# Altium PCB DC-DC PCB.PcbDoc
Units mm, origin at the board's own origin, x right, y up, seen from the top; angles counter-clockwise.
Board outline 99 x 99 mm, 2 copper layers (Top Layer, Bottom Layer); 57 components, 30 nets, 133 pads, 36 vias.
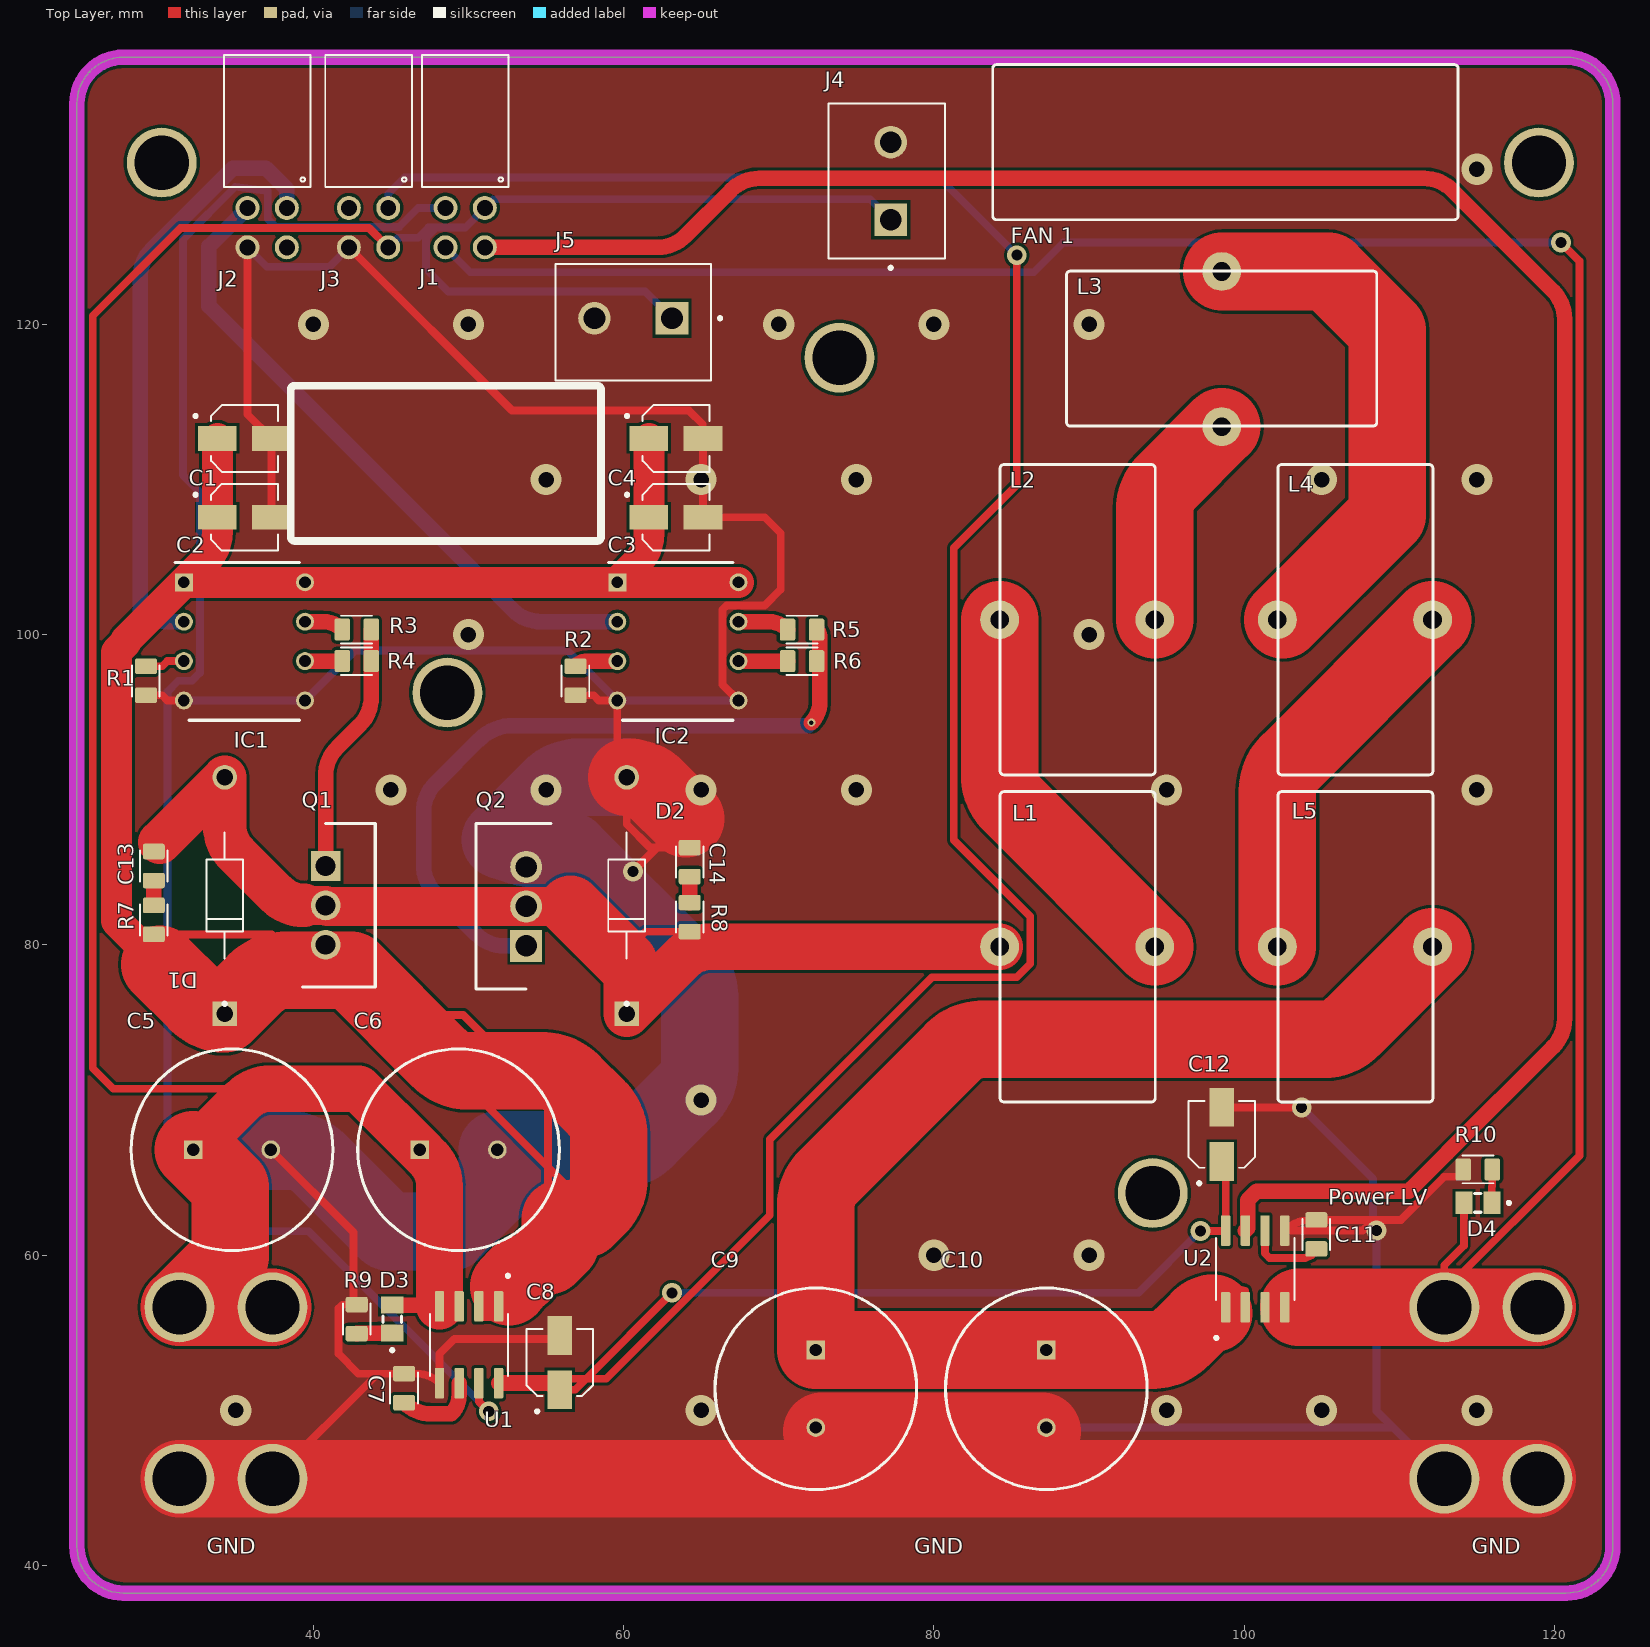
[diagram p0: Top Layer view]
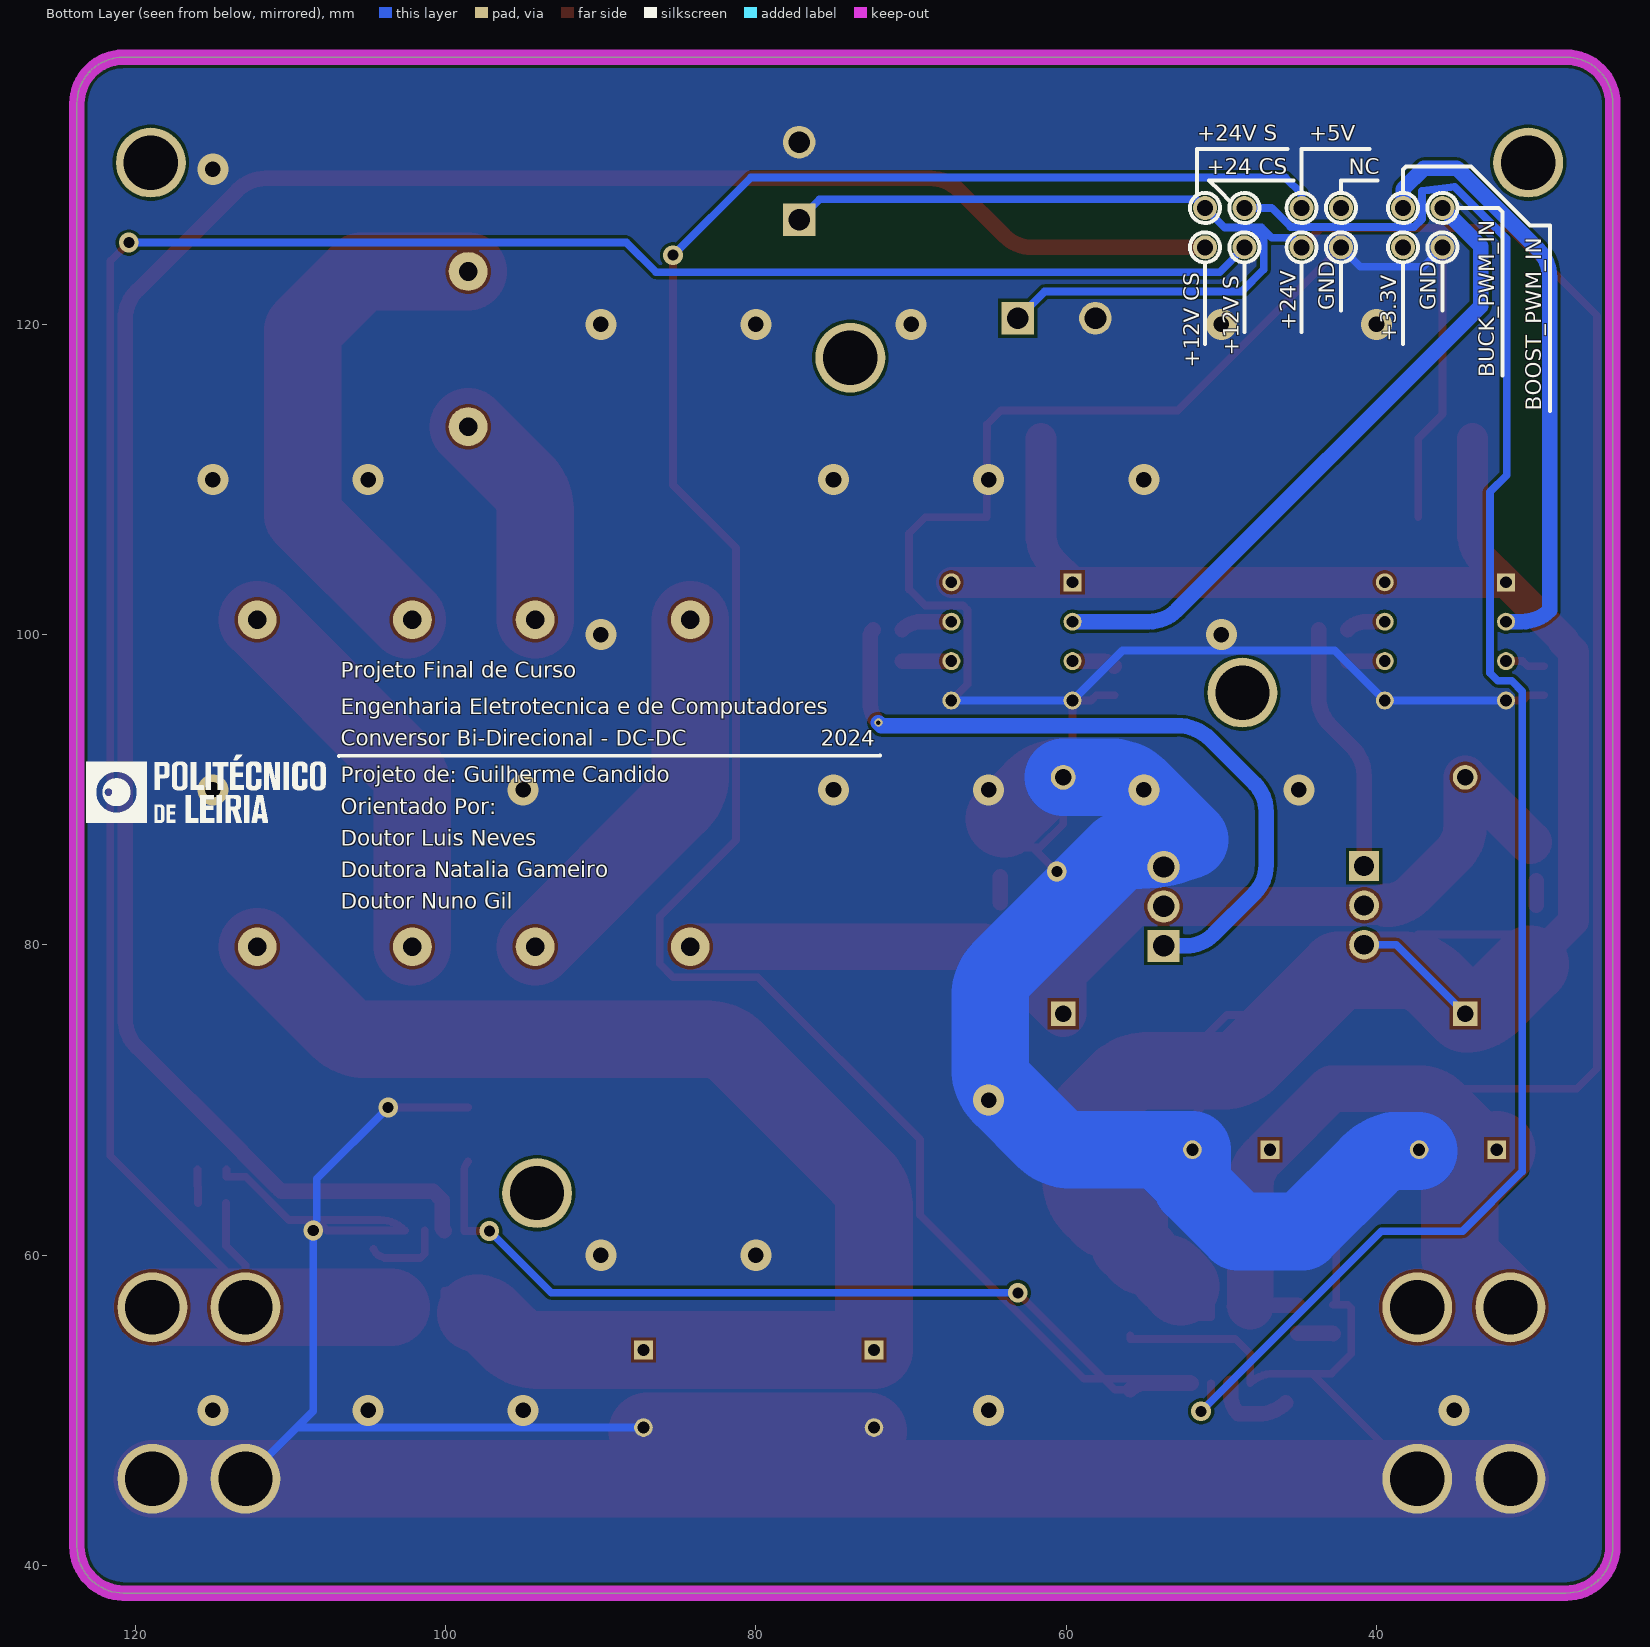
[diagram p1: Bottom Layer view, seen from below]
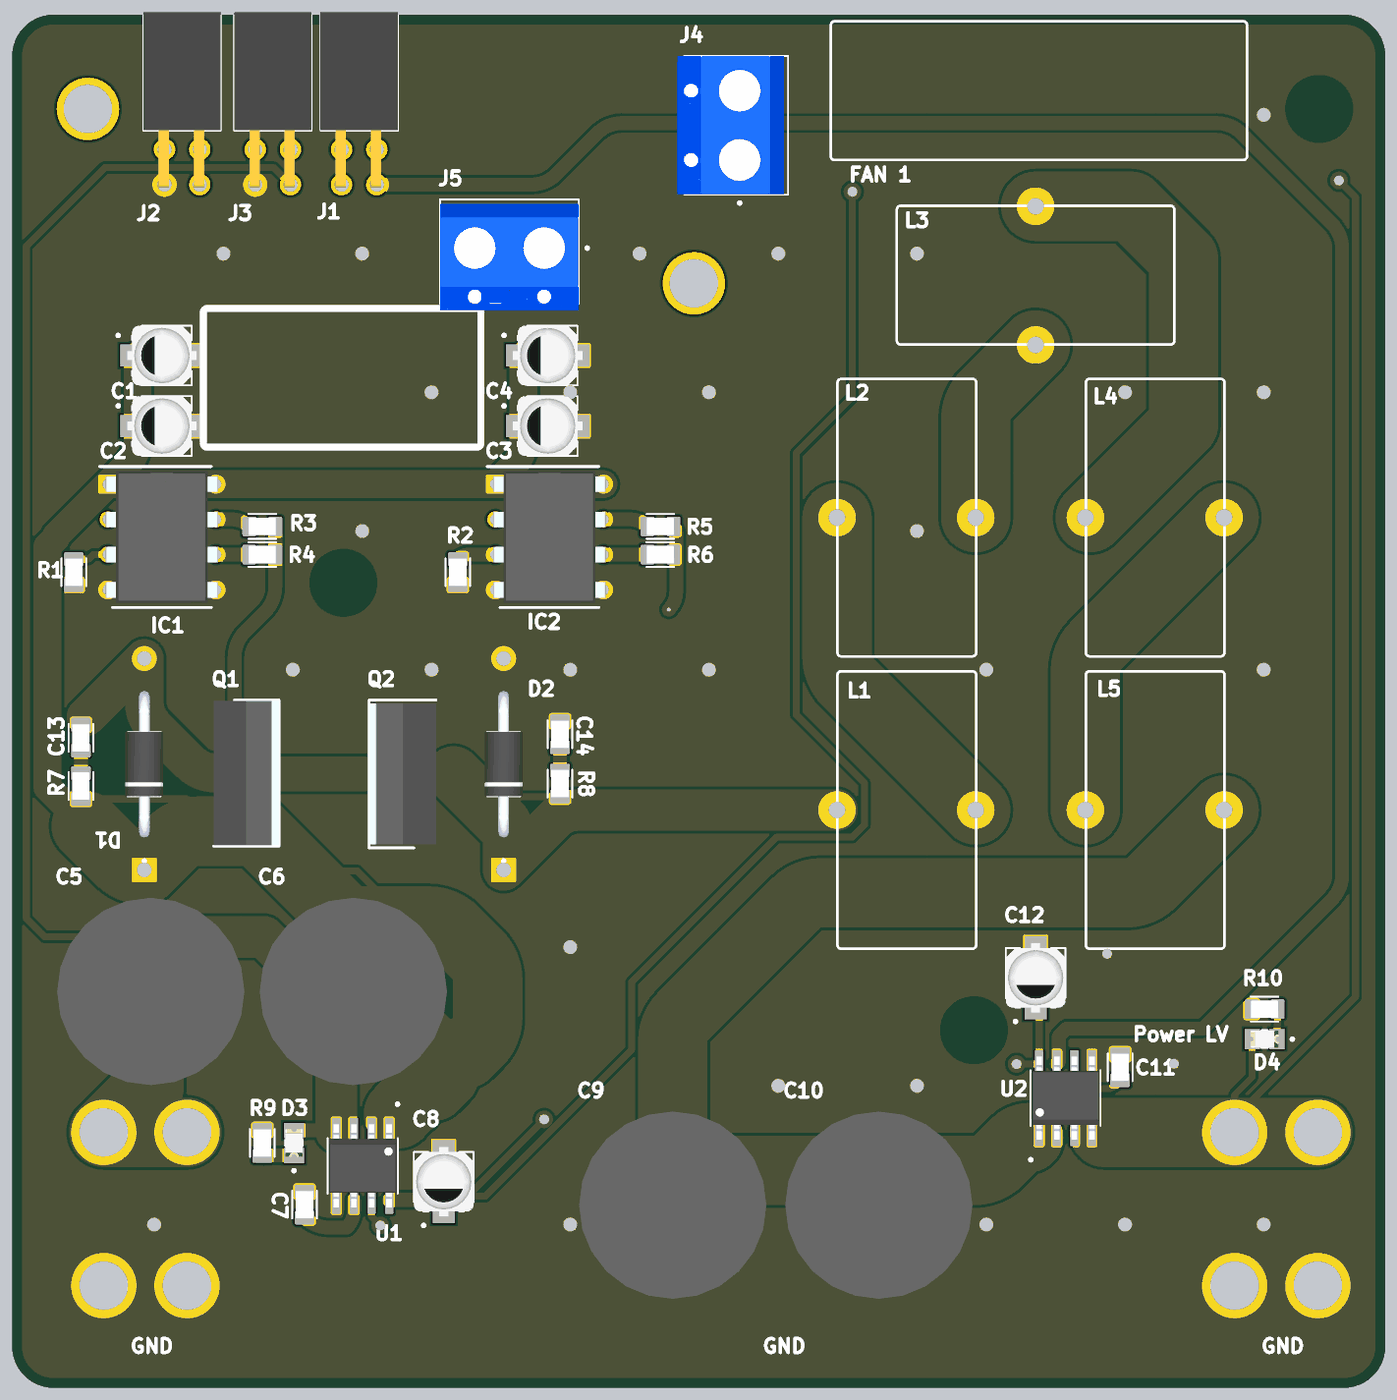
[diagram p2: 3D render of the assembled board from above, using the file's embedded part models]

## Layer stack, top to bottom
Top Solder: solder mask 0.0102, Solder Resist, Dk 3.5
Top Layer: signal copper 0.0356
Dielectric 1: dielectric 0.32, FR-4, Dk 4.8
Bottom Layer: signal copper 0.0356
Bottom Solder: solder mask 0.0102, Solder Resist, Dk 3.5

## Board outline
24.765,41.227 24.765,134.227 cw(c27.765,134.227) 27.765,137.227 120.765,137.227 cw(c120.765,134.227) 123.765,134.227 123.765,41.227 cw(c120.765,41.227) 120.765,38.227 27.765,38.227 cw(c27.765,41.227)

## Design rules (kind name [scope] priority, off if disabled: settings)
Clearance [All] p1: gap=0.2 ignorepadtopadclearanceinfootprint=TRUE
HoleSize [All] p1: absolutevalues=TRUE maxlimit=6.3 minlimit=0.3 maxpercent=80.000 minpercent=20.000
HoleToHoleClearance [All] p1: gap=0.5 allowstackedmicrovias=TRUE
PolygonConnect DirectPour [InNetClass('DirectPour')] p1: connectstyle=Direct reliefconductorwidth=0.254 reliefentries=4 polygonreliefangle="90 Angle" airgapwidth=0.254
PolygonConnect [All] p2: connectstyle=Relief reliefconductorwidth=0.254 reliefentries=4 polygonreliefangle="90 Angle" airgapwidth=0.254
RoutingVias [All] p1: holewidth=0.711 width=1.27 viastyle="Through Hole" minholewidth=0.3 minwidth=0.5 maxholewidth=6.3 maxwidth=10
SilkToSilkClearance [All] p1: silktosilkclearance=0
SolderMaskExpansion [All] p1: expansion=0.102 istentingtop=FALSE
UnRoutedNet [All] p1: checkbadconnections=TRUE
Width [All] p1: maxlimit=5 minlimit=0.127 preferedwidth=0.5 minimp=50.000000 maximp=50.000000 favimp=50.000000
26 further rules are at their usual default settings.

## Classes and differential pairs
net class DirectPour: +24 "+24 Driver" GND Net_1 NetC9_1 NetC13_2 NetL1_2 NetL2_2 NetL3_2 NetL4_2
component class "Mosfet Driver": C1 C2 C3 C4 IC1 IC2 R1 R2
component class "DC-DC Circuit": C5 C6 C7 C8 C9 C10 C11 C12 C13 C14 D1 D2 D3 D4 L1 L2 L3 L4 L5 Q1 Q2 R3 R4 R5 R6 R7 R8 R9 R10 U1 U2
component class Conectors: J1 J2 J3

## Components (designator, comment, footprint, x,y, rotation, side; value= is the part's Value field where it differs from the comment)
C1 "4.7uF" "Electrolytic 4x5.4" 35.56,112.649 r0 top
C2 "1uF" "Electrolytic 4x5.4" 35.56,107.569 r0 top
C3 "4.7uF" "Electrolytic 4x5.4" 63.373,107.569 r0 top
C4 "1uF" "Electrolytic 4x5.4" 63.373,112.649 r0 top
C5 "2200uF" CAPPRD500W62D1300H2150 32.258,66.802 r0 top
C6 "2200uF" CAPPRD500W62D1300H2150 46.863,66.802 r0 top
C7 "0805_Capacitor" 0805 45.847,51.435 r270 top
C8 "1uF (4x5.4)" "Electrolytic 4x5.4" 55.88,53.086 r90 top
C9 "2200uF" CAPPRD500W62D1300H2150 72.39,53.895 r270 top
C10 "2200uF" CAPPRD500W62D1300H2150 87.249,53.895 r270 top
C11 "1nF" 0805 104.648,61.341 r270 top
C12 "1uF (4x5.4)" "Electrolytic 4x5.4" 98.552,67.79 r90 top
C13 "C" 0805 29.718,85.09 r90 top
C14 "C" 0805 64.262,85.344 r90 top
D1 "15SQ045" "Common Trhough Hole" 34.29,83.185 r90 top
D2 "15SQ045" "Common Trhough Hole" 60.198,83.185 r90 top
D3 "RED - 0805" "LED 0805" 45.085,55.88 r90 top
D4 "RED - 0805" "LED 0805" 115.062,63.373 r180 top
IC1 "TC4431EPA" DIP781W56P254L950H533Q8N 35.56,99.568 r0 top
IC2 "TC4432EPA" DIP781W56P254L950H533Q8N 63.5,99.568 r0 top
J1 "2x4-POS 2.54mm Header" "2x4-POS 2.54mm Female Header" 49.784,126.238 r180 top
J2 "2x4-POS 2.54mm Header" "2x4-POS 2.54mm Female Header" 37.02,126.238 r180 top locked
J3 "2x4-POS 2.54mm Header" "2x4-POS 2.54mm Female Header" 43.56,126.238 r180 top
J4 "KF301-2P" KF301-2P 77.216,129.246 r90 top
J5 "KF301-2P" KF301-2P 60.619,120.396 r180 top
L1 "Coil_62125" "Coil 65125" 84.234,79.883 r0 top
L2 "Coil_62125" "Coil 65125" 84.234,100.965 r0 top
L3 "Coil_62125" "Coil 65125" 98.552,113.411 r90 top
L4 "Coil_62125" "Coil 65125" 102.141,100.965 r0 top
L5 "Coil_62125" "Coil 65125" 102.141,79.883 r0 top
Q1 "IRF9540NPBF" TO254P469X1042X1967-3P 40.797,85.09 r270 top
Q2 "IRF640NPBF" TO254P483X1016X1994-3P 53.721,79.945 r90 top
R1 "0R" 0805 29.21,97.028 r90 top
R2 "0R" 0805 56.896,97.028 r90 top
R3 "0805_Resistor" 0805 42.799,100.33 r0 top
R4 "0805_Resistor" 0805 42.799,98.298 r0 top
R5 "0805_Resistor" 0805 71.501,100.33 r0 top
R6 "0805_Resistor" 0805 71.501,98.298 r0 top
R7 "R" 0805 29.718,81.615 r270 top
R8 "R" 0805 64.262,81.788 r270 top
R9 "1k" 0805 42.799,55.88 r270 top
R10 "1k" 0805 115.062,65.532 r0 top
U1 "ACS712" ACS712 50.038,54.229 r270 top
U2 "ACS712" ACS712 100.711,59.117 r90 top locked
? "M3 Mounting Hole" "M3 - Mounting Hole"#1 73.914,117.856 r0 top
? "M3 Mounting Hole" "M3 - Mounting Hole"#2 127.508,42.291 r0 top
? "M3 Mounting Hole" "M3 - Mounting Hole"#3 133.477,42.291 r0 top locked
? "M3 Mounting Hole" "M3 - Mounting Hole"#4 147.066,42.799 r0 top
? "M3 Mounting Hole" "M3 - Mounting Hole"#5 139.446,42.291 r0 top
? "M3 Mounting Hole" "M3 - Mounting Hole"#6 33.528,45.593 r0 top locked
? "M3 Mounting Hole" "M3 - Mounting Hole"#7 33.147,56.642 r0 top locked
? "M3 Mounting Hole" "M3 - Mounting Hole"#8 39.116,56.642 r0 top locked
? "M3 Mounting Hole" "M3 - Mounting Hole"#9 39.497,45.593 r0 top locked
? "M3 Mounting Hole" "M3 - Mounting Hole"#10 117.602,56.642 r0 top locked
? "M3 Mounting Hole" "M3 - Mounting Hole"#11 111.633,56.642 r0 top locked
? "M3 Mounting Hole" "M3 - Mounting Hole"#12 105.664,57.15 r90 top locked
? "M3 Mounting Hole" "M3 - Mounting Hole"#13 97.663,57.15 r90 top locked

## Footprints (in the part's own frame and the unit in brackets; to place one, negate y for a bottom-side part, rotate by r counter-clockwise, add the part's x,y. Pads: shape width x height; smd on the part's side, far side on the other; paste and mask are expansions set on the pad)
"2x4-POS 2.54mm Female Header" [mm]
  round 1.545 hole 1.03: 1(-1.27,-1.27) 2(-1.27,1.27) 3(1.27,-1.27) 4(1.27,1.27)
  silkscreen extent -2.79,-11.13 2.79,-2.63, body extent -2.79,-11.15 2.79,1.45, height 5.02
0805 [mm]
  rrect25% 1x1.42 smd: 1(-0.935,0) 2(0.935,0)
  silkscreen extent -1,-0.89 1,0.89, body extent -1,-0.63 1,0.63, height 0.6
ACS712 [mm]
  rrect25% 1.97x0.6 smd: 1(-2.475,1.905) 2(-2.475,0.635) 3(-2.475,-0.635) 4(-2.475,-1.905) 5(2.475,-1.905) 6(2.475,-0.635) 7(2.475,0.635) 8(2.475,1.905)
  silkscreen extent -4.54,-2.53 2,2.6, body extent -3,-2.45 3,2.45, height 1.75
CAPPRD500W62D1300H2150 [mm]
  rect 1.2x1.2 hole 0.8: 1(0,0)
  round 1.2 hole 0.8: 2(5,0)
  silkscreen extent -4,-6.5 9,6.5, body extent -4.25,-6.75 9.25,6.75, height 21.5
"Coil 65125" [mm]
  round 2.5 hole 1.2: 1(0,0) 2(10,0)
  silkscreen extent 0.03,-10 10.03,10
"Common Trhough Hole" [mm]
  rect 1.59x1.59 / inner round 1.59 / far side rect 1.59x1.59 hole 1.06: 1(-7.62,0)
  round 1.59 hole 1.06: 2(7.62,0)
  silkscreen extent -7.07,-1.19 4.07,1.19, body extent -5.29,-1.36 5.29,1.36, height 2.72
DIP781W56P254L950H533Q8N [mm]
  rect 1.159x1.159 hole 0.759: 1(-3.905,3.81)
  round 1.159 hole 0.759: 2(-3.905,1.27) 3(-3.905,-1.27) 4(-3.905,-3.81) 5(3.905,-3.81) 6(3.905,-1.27) 7(3.905,1.27) 8(3.905,3.81)
  silkscreen extent -4.48,-5.08 3.56,5.08, body extent -4.05,-4.75 4.05,4.75, height 5.33
"Electrolytic 4x5.4" [mm]
  rect 2.5x1.6 smd: 1(-1.75,0) 2(1.75,0)
  silkscreen extent -3.25,-2.15 2.15,2.15, body extent -2.5,-2.15 2.5,2.15, height 5.78
KF301-2P [mm]
  rect 2.1x2.1 hole 1.4: 1(-2.5,0)
  round 2.1 hole 1.4: 2(2.5,0)
  silkscreen extent -5.7,-3.5 5,4, body extent -5,-3.2 5,4.5, height 10
"LED 0805" [mm]
  rect 1.1x1.45 smd: A(0.9,0) C(-0.9,0)
  silkscreen extent -2.1,-0.6 0.2,0.6, body extent -1,-0.63 1,0.63, height 0.7
"M3 - Mounting Hole"#1 [mm]
  round 4.5 / inner round 1.524 / far side round 4.5 hole 3.5: 1(0,0)
"M3 - Mounting Hole"#2 [mm]
  round 4.5 / inner round 1.524 / far side round 4.5 hole 3.5: 1(-97.282,88.138)
"M3 - Mounting Hole"#3 [mm]
  round 4.5 / inner round 1.524 / far side round 4.5 hole 3.5: 1(-84.836,53.975)
"M3 - Mounting Hole"#4 [mm]
  round 4.5 / inner round 1.524 / far side round 4.5 hole 3.5: 1(-28.067,87.63)
"M3 - Mounting Hole"#5 [mm]
  round 4.5 / inner round 1.524 / far side round 4.5 hole 3.5: 1(-45.339,21.717)
"M3 - Mounting Hole"#6 [mm]
  round 4.5 / inner round 1.524 / far side round 4.5 hole 3.5: 1(-2.159,0)
"M3 - Mounting Hole"#7 [mm]
  round 4.5 / inner round 1.524 / far side round 4.5 hole 3.5: 1(-1.778,0)
"M3 - Mounting Hole"#8 [mm]
  round 4.5 / inner round 1.524 / far side round 4.5 hole 3.5: 1(-1.747,0)
"M3 - Mounting Hole"#9 [mm]
  round 4.5 / inner round 1.524 / far side round 4.5 hole 3.5: 1(-2.128,0)
"M3 - Mounting Hole"#10 [mm]
  round 4.5 / inner round 1.524 / far side round 4.5 hole 3.5: 1(1.301,0)
"M3 - Mounting Hole"#11 [mm]
  round 4.5 / inner round 1.524 / far side round 4.5 hole 3.5: 1(1.27,0)
"M3 - Mounting Hole"#12 [mm]
  round 4.5 / inner round 1.524 / far side round 4.5 hole 3.5: 1(-11.557,-13.239)
"M3 - Mounting Hole"#13 [mm]
  round 4.5 / inner round 1.524 / far side round 4.5 hole 3.5: 1(-11.557,-15.24)
TO254P469X1042X1967-3P [mm]
  rect 1.92x1.92 hole 1.28: 1(0,0)
  round 1.92 hole 1.28: 2(2.54,0) 3(5.08,0)
  silkscreen extent -2.73,-1.5 7.81,3.19, body extent -2.67,-1.5 7.75,3.19, height 18.84
TO254P483X1016X1994-3P [mm]
  rect 2.07x2.07 hole 1.38: 1(0,0)
  round 2.07 hole 1.38: 2(2.54,0) 3(5.08,0)
  silkscreen extent -2.79,-1.61 7.87,3.22, body extent -2.54,-1.61 7.62,3.22, height 19.94

## Part data
C1 C2 C3 C4 C8 C12: library part "Electrolytic 4x5.4", Package="RADIAL-2 Panasonic", Availability="In Stock", Check_prices=https://www.snapeda.com/parts/EEE-HA1E100WR/Panasonic/view-part/778519/?ref=eda, MF=Panasonic, MP=EEE-HA1E100WR, Price=None, Purchase-URL=https://pricing.snapeda.com/search/part/EEE-HA1E100WR/?ref=eda, SnapEDA_Link=https://www.snapeda.com/parts/EEE-HA1E100WR/Panasonic/view-part/778519/?ref=snap
C5 C6 C9 C10: library part 860020578018, "Capacitor Polarised", Manufacturer_Name="Wurth Elektronik", Mouser Part Number=710-860020578018, Datasheet Link=https://ms.componentsearchengine.com/Datasheets/2/860020578018.pdf, Height=21.5mm, Manufacturer_Part_Number=860020578018, Mouser Price/Stock=https://www.mouser.co.uk/ProductDetail/Wurth-Elektronik/860020578018?qs=0KOYDY2FL28EAkbJaifUfg%3D%3D
C7: Package="0805 AVX", Availability="In Stock", Check_prices=https://www.snapeda.com/parts/LD051A121KAB2A/AVX/view-part/?ref=eda, MF=AVX, MP=LD051A121KAB2A, Price=None, Purchase-URL=https://pricing.snapeda.com/search/part/LD051A121KAB2A/?ref=eda, SnapEDA_Link=https://www.snapeda.com/parts/LD051A121KAB2A/AVX/view-part/?ref=snap
C11 C13 C14: library part 0805_Capacitor, Package="0805 AVX", Availability="In Stock", Check_prices=https://www.snapeda.com/parts/LD051A121KAB2A/AVX/view-part/?ref=eda, MF=AVX, MP=LD051A121KAB2A, Price=None, Purchase-URL=https://pricing.snapeda.com/search/part/LD051A121KAB2A/?ref=eda, SnapEDA_Link=https://www.snapeda.com/parts/LD051A121KAB2A/AVX/view-part/?ref=snap
D1 D2: library part "Schottky Diode", Package="DO-41 Diodes Inc.", Availability="In Stock", Check_prices=https://www.snapeda.com/parts/1N5817-T/Diodes+Inc./view-part/?ref=eda, MF="Diodes Inc.", MP=1N5817-T, Price=None, Purchase-URL=https://pricing.snapeda.com/search/part/1N5817-T/?ref=eda, SnapEDA_Link=https://www.snapeda.com/parts/1N5817-T/Diodes+Inc./view-part/?ref=snap
D3 D4: library part "LED 0805", "LED Uni-Color Green 4-Pin Chip 0805 T/R", Package=None, Availability=Unavailable, MP=597-3305-607F, Price=None
IC1: "Integrated Circuit", Manufacturer_Name=Microchip, Mouser Part Number=579-TC4431EPA, Arrow Part Number=TC4431EPA, Arrow Price/Stock=https://www.arrow.com/en/products/tc4431epa/microchip-technology, Datasheet Link=http://www.microchip.com/mymicrochip/filehandler.aspx?ddocname=en011707, Height=5.334mm, Manufacturer_Part_Number=TC4431EPA, Mouser Price/Stock=https://www.mouser.co.uk/ProductDetail/Microchip-Technology/TC4431EPA?qs=6NittM2kKvToa0NDydYeNA%3D%3D
IC2: "Integrated Circuit", Manufacturer_Name=Microchip, Mouser Part Number=579-TC4432EPA, Arrow Part Number=TC4432EPA, Arrow Price/Stock=https://www.arrow.com/en/products/tc4432epa/microchip-technology, Datasheet Link=http://ww1.microchip.com/downloads/en/DeviceDoc/21424d.pdf, Height=5.334mm, Manufacturer_Part_Number=TC4432EPA, Mouser Price/Stock=https://www.mouser.co.uk/ProductDetail/Microchip-Technology-Atmel/TC4432EPA?qs=EkZBwCRGcSv79fL5L3lP6g%3D%3D
J1 J2 J3: "Female header [WÃ¼rth Elektronik] 613004243121 Female header", Package=None, Availability=Unavailable, Check_prices=https://www.snapeda.com/parts/613004243121/W%C3%BCrth%20Elektronik/view-part/1737074/?ref=eda, MF="WÃ¼rth Elektronik", MP=613004243121, Price=None, SnapEDA_Link=https://www.snapeda.com/parts/613004243121/W%C3%BCrth%20Elektronik/view-part/1737074/?ref=snap
J4 J5: "2 Pin Terminal Block 5mm Pitch", Package=None, Availability=Unavailable, MP=KF301-2P, Price=None
L1 L2 L3 L4 L5: "Inductor Power Wirewound 470uH 10% 1KHz 25Q-Factor Ferrite 210mA 3.3Ohm DCR T/R", Package="Nonstandard Bourns", Digi-Key_Part_Number=SDR0604-471KLCT-ND, Digi-Key_Purchase_URL=https://www.digikey.com/product-detail/en/bourns-inc/SDR0604-471KL/SDR0604-471KLCT-ND/2352941?utm_source=snapeda&utm_medium=aggregator&utm_campaign=symbol, MF=Bourns, MP=SDR0604-471KL, SnapEDA_Link=https://www.snapeda.com/parts/SDR0604-471KL/Bourns/view-part/567387/?ref=snap
Q1: "MOSFET (P-Channel)", Manufacturer_Name=Infineon, Mouser Part Number=942-IRF9540NPBF, Arrow Part Number=IRF9540NPBF, Arrow Price/Stock=https://www.arrow.com/en/products/irf9540npbf/infineon-technologies-ag?region=europe, Datasheet Link=https://www.infineon.com/dgdl/irf9540npbf.pdf?fileId=5546d462533600a401535611cfa21dc8, Height=4.69mm, Manufacturer_Part_Number=IRF9540NPBF, Mouser Price/Stock=https://www.mouser.co.uk/ProductDetail/Infineon-Technologies/IRF9540NPBF?qs=9%252BKlkBgLFf0vnuA8mxUPtw%3D%3D
Q2: "MOSFET (N-Channel)", Manufacturer_Name=Infineon, Mouser Part Number=942-IRF640NPBF, Arrow Part Number=IRF640NPBF, Arrow Price/Stock=https://www.arrow.com/en/products/irf640npbf/infineon-technologies-ag?region=europe, Datasheet Link=https://www.infineon.com/dgdl/Infineon-IRF640N-DataSheet-v01_01-EN.pdf?fileId=5546d462533600a4015355e7be9019ee, Height=4.83mm, Manufacturer_Part_Number=IRF640NPBF, Mouser Price/Stock=https://www.mouser.co.uk/ProductDetail/Infineon-Technologies/IRF640NPBF?qs=9%252BKlkBgLFf3E8kFH1ru13w%3D%3D
R1 R2 R7 R8 R9 R10: library part 0805_Resistor, Package=0805, Power_Rating=".25 W", Resistance=.33, Tolerance=1%, Availability="In Stock", Check_prices=https://www.snapeda.com/parts/2-2176053-0/TE+Connectivity/view-part/?ref=eda, EU_RoHS_Compliance="Compliant with Exemptions", MF="TE Connectivity", MP=2-2176053-0, Price=None, SnapEDA_Link=https://www.snapeda.com/parts/2-2176053-0/TE+Connectivity/view-part/?ref=snap
R3 R4 R5 R6: Package=0805, Power_Rating=".25 W", Resistance=.33, Tolerance=1%, Availability="In Stock", Check_prices=https://www.snapeda.com/parts/2-2176053-0/TE+Connectivity/view-part/?ref=eda, EU_RoHS_Compliance="Compliant with Exemptions", MF="TE Connectivity", MP=2-2176053-0, Price=None, SnapEDA_Link=https://www.snapeda.com/parts/2-2176053-0/TE+Connectivity/view-part/?ref=snap
U1 U2: "Current Sensor 5A 1 Channel Hall Effect, Open Loop Bidirectional 8-SOIC (0.154, 3.90mm Width)", Package="SOIC-8 Allegro MicroSystems LLC", Availability="In Stock", Check_prices=https://www.snapeda.com/parts/ACS712ELCTR-05B-T/Allegro+MicroSystems+LLC/view-part/?ref=eda, MF="Allegro MicroSystems LLC", MP=ACS712ELCTR-05B-T, Price=None, Purchase-URL=https://pricing.snapeda.com/search/part/ACS712ELCTR-05B-T/?ref=eda, SnapEDA_Link=https://www.snapeda.com/parts/ACS712ELCTR-05B-T/Allegro+MicroSystems+LLC/view-part/?ref=snap

## Via types
v1: diameter 2, hole 1, Top Layer to Bottom Layer, tented both sides, 27 vias
v2: diameter 1.27, hole 0.711, Top Layer to Bottom Layer, tented both sides, 8 vias
v3: diameter 0.5, hole 0.3, Top Layer to Bottom Layer, tented both sides, 1 vias

## Nets (pads, with @x,y where several pads share a name; then routed paths per layer and width w, separated by ;. In a path a pad name is that pad's centre, name@x,y a point inside that pad or via, vN(x,y) a via of type N, cw(c..) or ccw(c..) an arc to the next point about the centre after c; other vN are vias at no path point)
+3.3: J2.2
+5: C8.1 C12.1 J3.1 U1.8 U2.8 | length 198.2
  Top Layer w0.5: U1.8 51.943,52.045 57.582,52.045 ; C8.1 56.873,51.336 57.582,52.045 ; v2(63.119,57.582) 57.582,52.045 ; v2(85.344,124.46) 85.344,109.652 81.28,105.588 81.28,86.766 86.208,81.839 86.208,78.791 85.344,77.927 79.883,77.927 69.418,67.462 69.418,62.586 58.877,52.045 57.582,52.045 ; v2(97.18,61.57) 98.806,61.57 U2.8 C12.1@98.806,65.427 ; C12.1@98.806,65.427 ccw(c97.939,65.427) C12.1 cw(c97.939,65.427) C12.1@98.806,65.427
  Top Layer w1: U1.8 54.871,51.754 cw(c54.871,50.327) C8.1
  Bottom Layer w0.5: J3.1 44.83,128.422 45.871,129.464 80.34,129.464 v2(85.344,124.46) ; v2(63.119,57.582) 93.193,57.582 v2(97.18,61.57)
+24: ?.1@31.369,56.642 ?.1@37.369,56.642 C5.1 C6.1 D3.A J1.1 J3.2 J4.1 J5.1 U1.3 U1.4 | length 208.4
  Top Layer w0.5: C5.1 32.258,67.546 35.451,70.739 27.102,70.739 25.781,72.06 25.781,120.548 31.445,126.213 43.585,126.213 J3.2 ; 37.247,70.739 42.926,70.739 C6.1 ; U1.4 U1.3
  Top Layer w1: D3.A 47.949,56.78 cw(c47.949,56.52) U1.4
  Top Layer w3: C5.1 35.451,69.995 ; U1.4 48.133,64.48 ; 35.451,69.995 cw(c37.247,68.199) 37.247,70.739 ; 35.451,69.995 cw(c37.247,68.199) 37.247,70.739 ; 37.247,70.739 42.926,70.739 C6.1 C6.1@47.389,66.276 ; C6.1@47.389,66.276 cw(c45.593,64.48) 48.133,64.48 ; C6.1@47.389,66.276 cw(c45.593,64.48) 48.133,64.48
  Top Layer w5: C5.1 34.647,64.413 34.647,59.92 31.369,56.642 ?.1@37.369,56.642
  Bottom Layer w0.5: J3.2 45.447,125.585 46.753,125.585 47.405,126.238 49.784,126.238 ; J5.1 61.392,122.123 48.692,122.123 47.269,123.546 47.269,125.578 47.93,126.238 49.784,126.238 ; J4.1 75.895,128.067 51.613,128.067 J1.1 49.784,126.238
"+24 Driver": C1.1 C2.1 C3.1 C4.1 D1.1 IC1.1 IC1.8 IC2.1 IC2.8 Q1.3 R7.2 U1.1 U1.2 | length 229.8
  Top Layer w0.5: R7.2 37.328,80.68 42.52,75.489 45.318,75.489 ; Q1.3 42.448,78.359 45.318,75.489 ; U1.2 50.673,56.007 51.943,56.007 U1.1 51.943,57.988 52.614,57.988 ; 53.43,58.795 53.43,58.801 56.083,58.801 56.363,59.08 56.363,64.444 55.134,65.673 ; 55.134,59.96 55.134,65.673 ; 45.318,75.489 48.181,72.626 55.134,65.673 ; 45.318,75.489 49.657,75.489 55.134,70.012 55.134,65.673
  Top Layer w2: 30.099,78.74 27.3,81.539 27.3,98.887 27.94,99.527 27.94,99.663 IC1.1 ; C1.1 C2.1 33.81,106.585 ; C4.1 C3.1 61.623,106.458 ; IC2.8 IC2.1 ; IC1.1 33.066,104.789 ; IC1.1 IC1.8 IC2.1 ; 33.066,104.789 ccw(c31.27,106.585) 33.81,106.585 ; 33.066,104.789 ccw(c31.27,106.585) 33.81,106.585 ; IC2.1 60.879,104.662 ; 60.879,104.662 ccw(c59.083,106.458) 61.623,106.458 ; 60.879,104.662 ccw(c59.083,106.458) 61.623,106.458
  Top Layer w5: 30.099,78.74 32.556,76.283 ; 52.614,57.988 ccw(c48.961,61.402) 52.85,58.259 cw(c54.953,56.566) 53.43,58.795 ; 55.134,59.96 55.928,60.754 55.928,62.343 57.517,62.343 58.311,63.137 ; 32.556,76.283 ccw(c34.29,78.018) D1.1 ; 32.556,76.283 ccw(c34.29,78.018) D1.1 ; D1.1 36.34,77.615 ; 36.34,77.615 cw(c38.136,75.819) 38.136,78.359 ; 36.34,77.615 cw(c38.136,75.819) 38.136,78.359 ; 38.136,78.359 42.448,78.359 48.181,72.626 ; 48.181,72.626 ccw(c49.977,74.422) 49.977,71.882 ; 48.181,72.626 ccw(c49.977,74.422) 49.977,71.882 ; 49.977,71.882 54.828,71.882 ; 54.828,71.882 cw(c54.828,69.342) 56.624,71.138 ; 54.828,71.882 cw(c54.828,69.342) 56.624,71.138 ; 56.624,71.138 58.311,69.451 ; 58.311,63.137 ccw(c56.515,64.933) 59.055,64.933 ; 58.311,63.137 ccw(c56.515,64.933) 59.055,64.933 ; 58.311,69.451 cw(c56.515,67.655) 59.055,67.655 ; 58.311,69.451 cw(c56.515,67.655) 59.055,67.655 ; 59.055,64.933 59.055,67.655
  Bottom Layer w0.5: D1.1 38.735,80.01 Q1.3
GND: ?.1@31.369,45.593 ?.1@37.369,45.593 ?.1@112.903,45.593 ?.1@118.903,45.593 C1.2 C2.2 C3.2 C4.2 C5.2 C6.2 C7.1 C8.2 C9.2 C10.2 C11.1 C12.2 C14.2 D2.2 IC1.4 IC1.5 IC2.4 IC2.5 J2.4 J3.4 J4.2 J5.2 Q2.3 R1.1 R2.1 R9.1 R10.1 U1.5 U2.5 | length 506
  Top Layer w0.5: R1.1 30.251,96.093 30.586,95.758 IC1.4 ; J2.4 35.75,114.209 C1.2 C2.2 ; C5.2 42.596,61.464 R9.1@42.596,56.815 ; ?.1@37.369,45.593 44.146,52.37 ; J3.4 52.806,114.452 64.211,114.452 65.1,113.563 65.1,112.649 C4.2 C3.2 69.088,107.569 70.129,106.528 70.129,102.921 69.088,101.879 66.65,101.879 66.37,101.6 66.37,96.793 IC2.5 ; R9.1 R9.1@42.596,56.815 ; C8.2 55.88,54.61 49.098,54.61 48.133,53.645 U1.5 ccw(c46.646,50.267) 46.646,52.37 C7.1 44.146,52.37 ; R2.1 58.064,96.093 58.399,95.758 IC2.4 59.595,91.408 D2.2 60.198,87.782 61.701,86.279 62.149,86.279 ; v2(60.604,84.734) 62.149,86.279 ; 64.008,88.138 62.149,86.279 ; C14.2 62.149,86.279 ; C9.2 72.771,48.895 C9.2@72.771,48.641 ; C10.2@86.995,48.641 C10.2 ; C12.2 98.552,69.52 v2(103.708,69.52) ; 108.306,62.255 v2@108.09,62.039 ; v2(108.534,61.595) v2@108.09,62.039 ; R10.1 114.127,65.064 112.889,65.064 110.102,62.276 107.853,62.276 ; R9.1@42.596,56.815 41.859,56.815 41.631,56.586 41.631,53.645 42.905,52.37 44.146,52.37 ; U2.5 cw(c104.267,59.941) C11.1@104.267,62.276 ; U2.5 cw(c104.267,59.941) C11.1@104.267,62.276 ; U2.5 107.642,61.592 v2@108.09,62.039 ; C11.1@104.267,62.276 C11.1 107.853,62.276 ; 107.853,62.276 v2@108.09,62.039
  Top Layer w5: ?.1@31.369,45.593 37.369,45.593 70.866,45.593 112.903,45.593 ?.1@118.903,45.593 ; D2.2 D2.2@60.289,90.805 ; 64.008,88.138 62.085,90.061 ; C9.2@72.771,48.641 C10.2@86.995,48.641 ; D2.2@60.289,90.805 cw(c60.289,88.265) 62.085,90.061 ; D2.2@60.289,90.805 cw(c60.289,88.265) 62.085,90.061
  Bottom Layer w0.5: IC1.4 IC1.5 42.691,98.984 56.369,98.984 IC2.4 IC2.5 ; J2.4 36.995,123.723 41.045,123.723 J3.4 ; C5.2 42.541,61.519 51.867,61.519 64.897,74.549 64.897,76.672 64.897,80.442 v2(60.604,84.734) ; Q2.3 53.721,87.732 56.794,90.805 57.12,90.805 D2.2 ; C10.2 109.601,48.895 ; v2(103.708,69.52) 108.306,64.922 108.306,62.255 ; v2(108.534,61.595) 108.534,49.962 109.601,48.895 ; ?.1@112.903,45.593 109.601,48.895
  Bottom Layer w5: D2.2 57.12,90.805 ; C5.2@37.305,66.722 ccw(c38.132,63.533) 37.281,66.716 cw(c38.132,63.533) C5.2@37.305,66.722 ; C5.2@37.305,66.722 38.959,66.722 ; 38.959,66.722 cw(c38.132,63.533) 40.46,65.864 ; 38.959,66.722 cw(c38.132,63.533) 40.46,65.864 ; 40.46,65.864 44.793,61.531 48.935,61.531 51.864,64.46 51.864,66.54 C6.2 59.654,66.802 ; 53.176,86.406 ccw(c54.714,91.163) 54.32,86.179 ; 53.176,86.406 ccw(c54.714,91.163) 54.32,86.179 ; 53.176,86.406 52.037,86.774 v1@55.324,90.061 ; 54.32,86.179 55.817,86.06 56.199,86.03 56.591,86.03 64.153,78.468 ; v1@55.324,90.061 cw(c57.12,88.265) 57.12,90.805 ; v1@55.324,90.061 cw(c57.12,88.265) 57.12,90.805 ; 59.654,66.802 ccw(c59.654,69.342) 61.45,67.546 ; 59.654,66.802 ccw(c59.654,69.342) 61.45,67.546 ; 61.45,67.546 v1@64.153,70.249 ; v1@64.153,70.249 ccw(c62.357,72.045) 64.897,72.045 ; v1@64.153,70.249 ccw(c62.357,72.045) 64.897,72.045 ; 64.153,78.468 cw(c62.357,76.672) 64.897,76.672 ; 64.153,78.468 cw(c62.357,76.672) 64.897,76.672 ; 64.897,72.045 64.897,76.672
  other v1: 35,50 65,50 95,50 105,50 115,50 80,60 90,60 65,70 45,90 55,90 65,90 75,90 95,90 115,90 50,100 90,100 55,110 65,110 75,110 105,110 115,110 40,120 50,120 70,120 80,120 90,120 115,130
Net_1: ?.1@112.903,56.642 ?.1@118.903,56.642 D4.A J1.4 U2.3 U2.4 | length 181
  Top Layer w0.5: U2.3 U2.4 102.616,55.956 103.505,55.956 103.505,56.642 111.836,56.642 ?.1@112.903,57.709 ; ?.1@112.903,56.642 ?.1@112.903,57.709 ; D4.A 114.162,60.619 112.903,59.36 ?.1@112.903,57.709 ; v2(120.421,125.273) 121.615,124.079 121.615,66.421 ?.1@112.903,57.709
  Top Layer w5: 103.505,56.642 112.903,56.642 ?.1@118.903,56.642
  Bottom Layer w0.5: J1.4 50.114,123.368 86.436,123.368 88.341,125.273 v2(120.421,125.273)
NetC7_2: C7.2 U1.6 | length 5.3
  Top Layer w1: C7.2 ccw(c47.576,52.229) 47.576,49.784 48.895,49.784 ccw(c47.669,51.01) 49.403,51.01 U1.6
NetC9_1: C9.1 C10.1 L5.2 U2.1 U2.2 | length 96.2
  Top Layer w0.5: 98.044,56.261 97.917,56.261 97.917,55.956 98.806,55.956 U2.1 99.06,57.963 100.076,57.709 U2.2
  Top Layer w5: 98.044,56.261 ccw(c98.044,55.035) 97.177,55.902 95.914,54.639 ; L5.2 106.916,74.658 ; 72.39,63.21 cw(c74.93,63.21) 73.134,65.006 ; 72.39,63.21 cw(c74.93,63.21) 73.134,65.006 ; 72.39,63.21 C9.1 C10.1 94.118,53.895 ; 73.134,65.006 81.298,73.17 ; 81.298,73.17 cw(c83.094,71.374) 83.094,73.914 ; 81.298,73.17 cw(c83.094,71.374) 83.094,73.914 ; 83.094,73.914 105.12,73.914 ; 94.118,53.895 ccw(c94.118,56.435) 95.914,54.639 ; 94.118,53.895 ccw(c94.118,56.435) 95.914,54.639 ; 105.12,73.914 ccw(c105.12,76.454) 106.916,74.658 ; 105.12,73.914 ccw(c105.12,76.454) 106.916,74.658
NetC11_2: C11.2 U2.6 | length 5.2
  Top Layer w0.5: U2.6 101.346,60.124 101.356,60.1 101.639,59.817 103.939,59.817 104.353,60 C11.2@104.499,60.146 ; C11.2@104.5,60.147 104.509,60.156 C11.2
NetC13_1: C13.1 R7.1 | length 1.6
  Top Layer w1: R7.1 C13.1
NetC13_2: C13.2 D1.2 D2.1 L1.1 Q1.2 Q2.2 R8.2 | length 83.4
  Top Layer w0.5: C13.2 30.023,86.025 30.023,86.614 30.099,86.614 ; D2.1 60.198,78.486 60.198,78.872 60.198,79.654 61.397,80.853 R8.2
  Top Layer w2.5: 39.406,82.55 Q1.2 ; 56.585,82.485 Q2.2 Q1.2@40.954,82.485 ; Q1.2 ccw(c40.954,82.707) Q1.2@40.954,82.485 ; Q1.2 ccw(c40.954,82.707) Q1.2@40.954,82.485
  Top Layer w2.8: 30.099,86.614 D1.2 34.29,87.666 ; 34.29,87.666 ccw(c36.83,87.666) 35.034,85.87 ; 34.29,87.666 ccw(c36.83,87.666) 35.034,85.87 ; 35.034,85.87 37.61,83.294 ; 37.61,83.294 ccw(c39.406,85.09) 39.406,82.55 cw(c39.406,85.09) 37.61,83.294
  Top Layer w3: 60.198,78.486 D2.1 63.772,79.139 ; L1.1 65.568,79.883 ; 63.772,79.139 cw(c65.568,77.343) 65.568,79.883 ; 63.772,79.139 cw(c65.568,77.343) 65.568,79.883
  Top Layer w4: 56.585,82.485 60.198,78.872
NetC14_1: C14.1 R8.1 | length 1.7
  Top Layer w1: R8.1 C14.1
NetD3_C: D3.C R9.2 | length 2.3
  Top Layer w1: R9.2 cw(c42.883,54.861) 42.883,54.98 D3.C
NetD4_C: D4.C R10.2 | length 2.2
  Top Layer w0.5: D4.C 115.962,64.414 115.997,64.449 R10.2
NetIC1_2: IC1.2 J2.1 | length 43.1
  Bottom Layer w1: IC1.2 30.643,100.838 ; J2.1@38.291,127.51 38.287,127.514 38.287,128.718 36.939,130.066 34.816,130.066 29.591,124.841 ; 28.847,101.582 ccw(c30.643,103.378) 30.643,100.838 ; 28.847,101.582 ccw(c30.643,103.378) 30.643,100.838 ; 28.847,101.582 28.847,123.045 ; 28.847,123.045 cw(c31.387,123.045) 29.591,124.841 ; 28.847,123.045 cw(c31.387,123.045) 29.591,124.841
NetIC1_3: IC1.3 R1.2 | length 2.6
  Top Layer w0.5: R1.2 30.251,97.963 30.586,98.298 IC1.3
NetIC1_6: IC1.6 R4.1 | length 2.4
  Top Layer w1: IC1.6 R4.1
NetIC1_7: IC1.7 R3.1 | length 3.9
  Top Layer w1: IC1.7 40.638,100.838 ; 40.638,100.838 cw(c40.638,99.104) R3.1 ccw(c40.638,99.104) 40.638,100.838
NetIC2_2: IC2.2 J2.3 | length 44
  Bottom Layer w1: J2.3 33.274,125.032 33.274,121.186 52.878,101.582 ; IC2.2 54.674,100.838 ; 52.878,101.582 ccw(c54.674,103.378) 54.674,100.838 ; 52.878,101.582 ccw(c54.674,103.378) 54.674,100.838
NetIC2_3: IC2.3 R2.2 | length 3.7
  Top Layer w1: IC2.3 57.705,98.298 ; 57.705,98.298 ccw(c57.705,97.154) R2.2 cw(c57.705,97.154) 57.705,98.298
NetIC2_6: IC2.6 R6.1 | length 3.2
  Top Layer w1: IC2.6 R6.1
NetIC2_7: IC2.7 R5.1 | length 4.7
  Top Layer w1: IC2.7 69.34,100.838 ; 69.34,100.838 cw(c69.34,99.104) R5.1 ccw(c69.34,99.104) 69.34,100.838
NetJ1_2: J1.2 U2.7 | length 156.7
  Top Layer w1: J1.2 62.194,124.968 ; U2.7 100.225,61.741 100.225,63.549 100.81,64.135 110.458,64.135 110.608,64.135 ; 62.194,124.968 ccw(c62.194,127.508) 63.99,125.712 ; 62.194,124.968 ccw(c62.194,127.508) 63.99,125.712 ; 63.99,125.712 66.947,128.669 ; 66.947,128.669 cw(c68.743,126.873) 68.743,129.413 ; 66.947,128.669 cw(c68.743,126.873) 68.743,129.413 ; 68.743,129.413 111.597,129.413 ; 110.608,64.135 110.724,64.251 ; 110.608,64.135 110.724,64.251 ; 110.724,64.251 ccw(c109.057,66.167) 110.853,64.371 ; 110.724,64.251 ccw(c109.057,66.167) 110.853,64.371 ; 110.853,64.371 113.044,66.562 ; 111.597,129.413 cw(c111.597,126.873) 113.393,128.669 ; 111.597,129.413 cw(c111.597,126.873) 113.393,128.669 ; 113.044,66.562 ccw(c112.335,67.268) 113.111,66.636 ; 113.044,66.562 ccw(c112.335,67.268) 113.111,66.636 ; 113.111,66.636 cw(c113.752,66.117) 113.17,66.702 119.904,73.422 ccw(c119.198,74.13) 119.906,73.424 ccw(c118.11,75.22) 120.65,75.22 120.65,120.36 ; 113.393,128.669 119.906,122.156 ; 119.906,122.156 cw(c118.11,120.36) 120.65,120.36 ; 119.906,122.156 cw(c118.11,120.36) 120.65,120.36
NetJ1_3: J1.3 U1.7 | length 112
  Top Layer w0.5: U1.7 50.673,50.571 v2(51.308,49.936)
  Bottom Layer w0.5: J1.3 46.761,127.508 45.539,126.285 37.579,126.285 37.067,126.797 37.067,128.594 34.969,128.876 31.598,125.504 31.598,110.287 32.69,109.195 32.69,97.536 32.182,97.028 31.293,97.028 30.607,96.342 30.607,65.405 34.458,61.554 39.69,61.554 v2(51.308,49.936)
NetL1_2: L1.2 L2.1 | length 27.1
  Top Layer w5: L2.1 84.234,90.935 ; L1.2 84.978,89.139 ; 84.234,90.935 ccw(c86.774,90.935) 84.978,89.139 ; 84.234,90.935 ccw(c86.774,90.935) 84.978,89.139
NetL2_2: L2.2 L3.1 | length 16.1
  Top Layer w5: L2.2 94.234,108.041 ; L3.1 94.978,109.837 ; 94.234,108.041 cw(c96.774,108.041) 94.978,109.837 ; 94.234,108.041 cw(c96.774,108.041) 94.978,109.837
NetL3_2: L3.2 L4.1 | length 34
  Top Layer w0.5: L4.1 L4.1@102.489,100.965
  Top Layer w5: L3.2 105.443,123.411 109.22,119.634 109.22,107.696 L4.1@102.489,100.965
NetL4_2: L4.2 L5.1 | length 27.1
  Top Layer w5: L5.1 102.141,89.913 ; L4.2 102.885,91.709 ; 102.141,89.913 cw(c104.681,89.913) 102.885,91.709 ; 102.141,89.913 cw(c104.681,89.913) 102.885,91.709
NetQ1_1: Q1.1 R3.2 R4.2 | length 20.2
  Top Layer w1: Q1.1 40.797,90.926 ; R3.2 R4.2 43.734,95.967 ; 40.797,90.926 cw(c43.337,90.926) 41.541,92.722 ; 40.797,90.926 cw(c43.337,90.926) 41.541,92.722 ; 41.541,92.722 42.99,94.171 ; 42.99,94.171 ccw(c41.194,95.967) 43.734,95.967 ; 42.99,94.171 ccw(c41.194,95.967) 43.734,95.967
NetQ2_1: Q2.1 R5.2 R6.2 | length 55.1
  Top Layer w0.5: R6.2 R5.2
  Top Layer w1: v3(72.106,94.333) ccw(c70.808,95.631) 72.644,95.631 R5.2@72.644,99.828 ; R5.2@72.644,99.828 ccw(c71.934,99.828) R5.2 cw(c71.934,99.828) R5.2@72.644,99.828
  Bottom Layer w1: Q2.1 52.298,79.945 ; v3(72.106,94.333) 71.916,94.143 52.88,94.143 ccw(c52.88,91.047) 50.691,93.236 47.861,90.406 ; 47.117,85.126 ccw(c49.657,85.126) 47.861,83.33 ; 47.117,85.126 ccw(c49.657,85.126) 47.861,83.33 ; 47.117,85.126 47.117,88.61 ; 47.117,88.61 cw(c49.657,88.61) 47.861,90.406 ; 47.117,88.61 cw(c49.657,88.61) 47.861,90.406 ; 47.861,83.33 50.502,80.689 ; 50.502,80.689 ccw(c52.298,82.485) 52.298,79.945 ; 50.502,80.689 ccw(c52.298,82.485) 52.298,79.945
pads on no net: ?.1@30.226,130.429 ?.1@48.641,96.266 ?.1@73.914,117.856 ?.1@94.107,64.008 ?.1@118.999,130.429 J3.3

## Polygon pours and split planes (outlines as drawn)
GND on Top Layer "GND_L01_P000" (solid, remove dead copper, pour order 0): 24.765,41.227 24.765,134.227 cw(c27.765,134.227) 27.765,137.227 120.765,137.227 cw(c120.765,134.227) 123.765,134.227 123.765,41.227 cw(c120.765,41.227) 120.765,38.227 27.765,38.227 cw(c27.765,41.227)
GND on Bottom Layer "GND_L02_P001" (solid, remove dead copper, pour order 1): 24.765,41.227 24.765,134.227 cw(c27.765,134.227) 27.765,137.227 120.765,137.227 cw(c120.765,134.227) 123.765,134.227 123.765,41.227 cw(c120.765,41.227) 120.765,38.227 27.765,38.227 cw(c27.765,41.227)

## Keep-outs
Keep-Out Layer:
  the board outline again, w1

## Silkscreen, mask and mechanical layers (free items; w line width, h text height)
Top Overlay:
  lines w0.18: 83.792,127 ccw(c84.046,127) 84.046,126.746 113.538,126.746 ccw(c113.538,127) 113.792,127 113.792,136.492 ccw(c113.538,136.492) 113.538,136.746 84.046,136.746 ccw(c84.046,136.492) 83.792,136.492 83.792,127
  lines w0.5: 38.547,106.299 ccw(c38.801,106.299) 38.801,106.045 58.293,106.045 ccw(c58.293,106.299) 58.547,106.299 58.547,115.791 ccw(c58.293,115.791) 58.293,116.045 38.801,116.045 ccw(c38.801,115.791) 38.547,115.791 38.547,106.299
  text "FAN 1" at 84.963,125.222 h1
  text "Power LV" at 105.41,63.246 h1
  text "GND" at 33.147,40.767 h1
  text "GND" at 78.74,40.767 h1
  text "GND" at 114.681,40.767 h1
Bottom Overlay:
  drawing of 62 lines, arcs and shapes, not listed
  text "+5V" at 44.323,131.826 h1
  text "+24V S" at 51.562,131.826 h1
  text "NC" at 41.783,129.667 h1
  text "+24 CS" at 50.927,129.667 h1
  text "GND" at 36.195,120.904 h1 r270
  text "GND" at 42.735,120.904 h1 r270
  text "+24V" at 45.212,119.634 h1 r270
  text "+3.3V" at 38.735,118.872 h1 r270
  text "+12V S" at 48.895,117.983 h1 r270
  text "+12V CS" at 51.435,117.221 h1 r270
  text "BUCK_PWM_IN" at 32.425,116.586 h1 r270
  text "BOOST_PWM_IN" at 29.377,114.427 h1 r270
  text "Projeto Final de Curso" at 106.751,97.234 h1
  text "Engenharia Eletrotecnica e de Computadores" at 106.751,94.869 h1
  text "2024" at 75.819,92.837 h1
  text "Conversor Bi-Direcional - DC-DC" at 106.751,92.838 h1
  text "Projeto de: Guilherme Candido" at 106.751,90.473 h1
  text "Orientado Por:" at 106.751,88.441 h1
  text "Doutor Luis Neves" at 106.751,86.41 h1
  text "Doutora Natalia Gameiro" at 106.751,84.378 h1
  text "Doutor Nuno Gil" at 106.751,82.347 h1